# Altium PCB PWR_REVE.PcbDoc
Units mm, origin at the board's own origin, x right, y up, seen from the top; angles counter-clockwise.
Board outline 95.88 x 101.01 mm, 4 copper layers (Top Layer, Layer 1, Layer 2, Bottom Layer), stack 1.586 mm thick; 16 components, 63 nets, 126 pads, 43 vias.
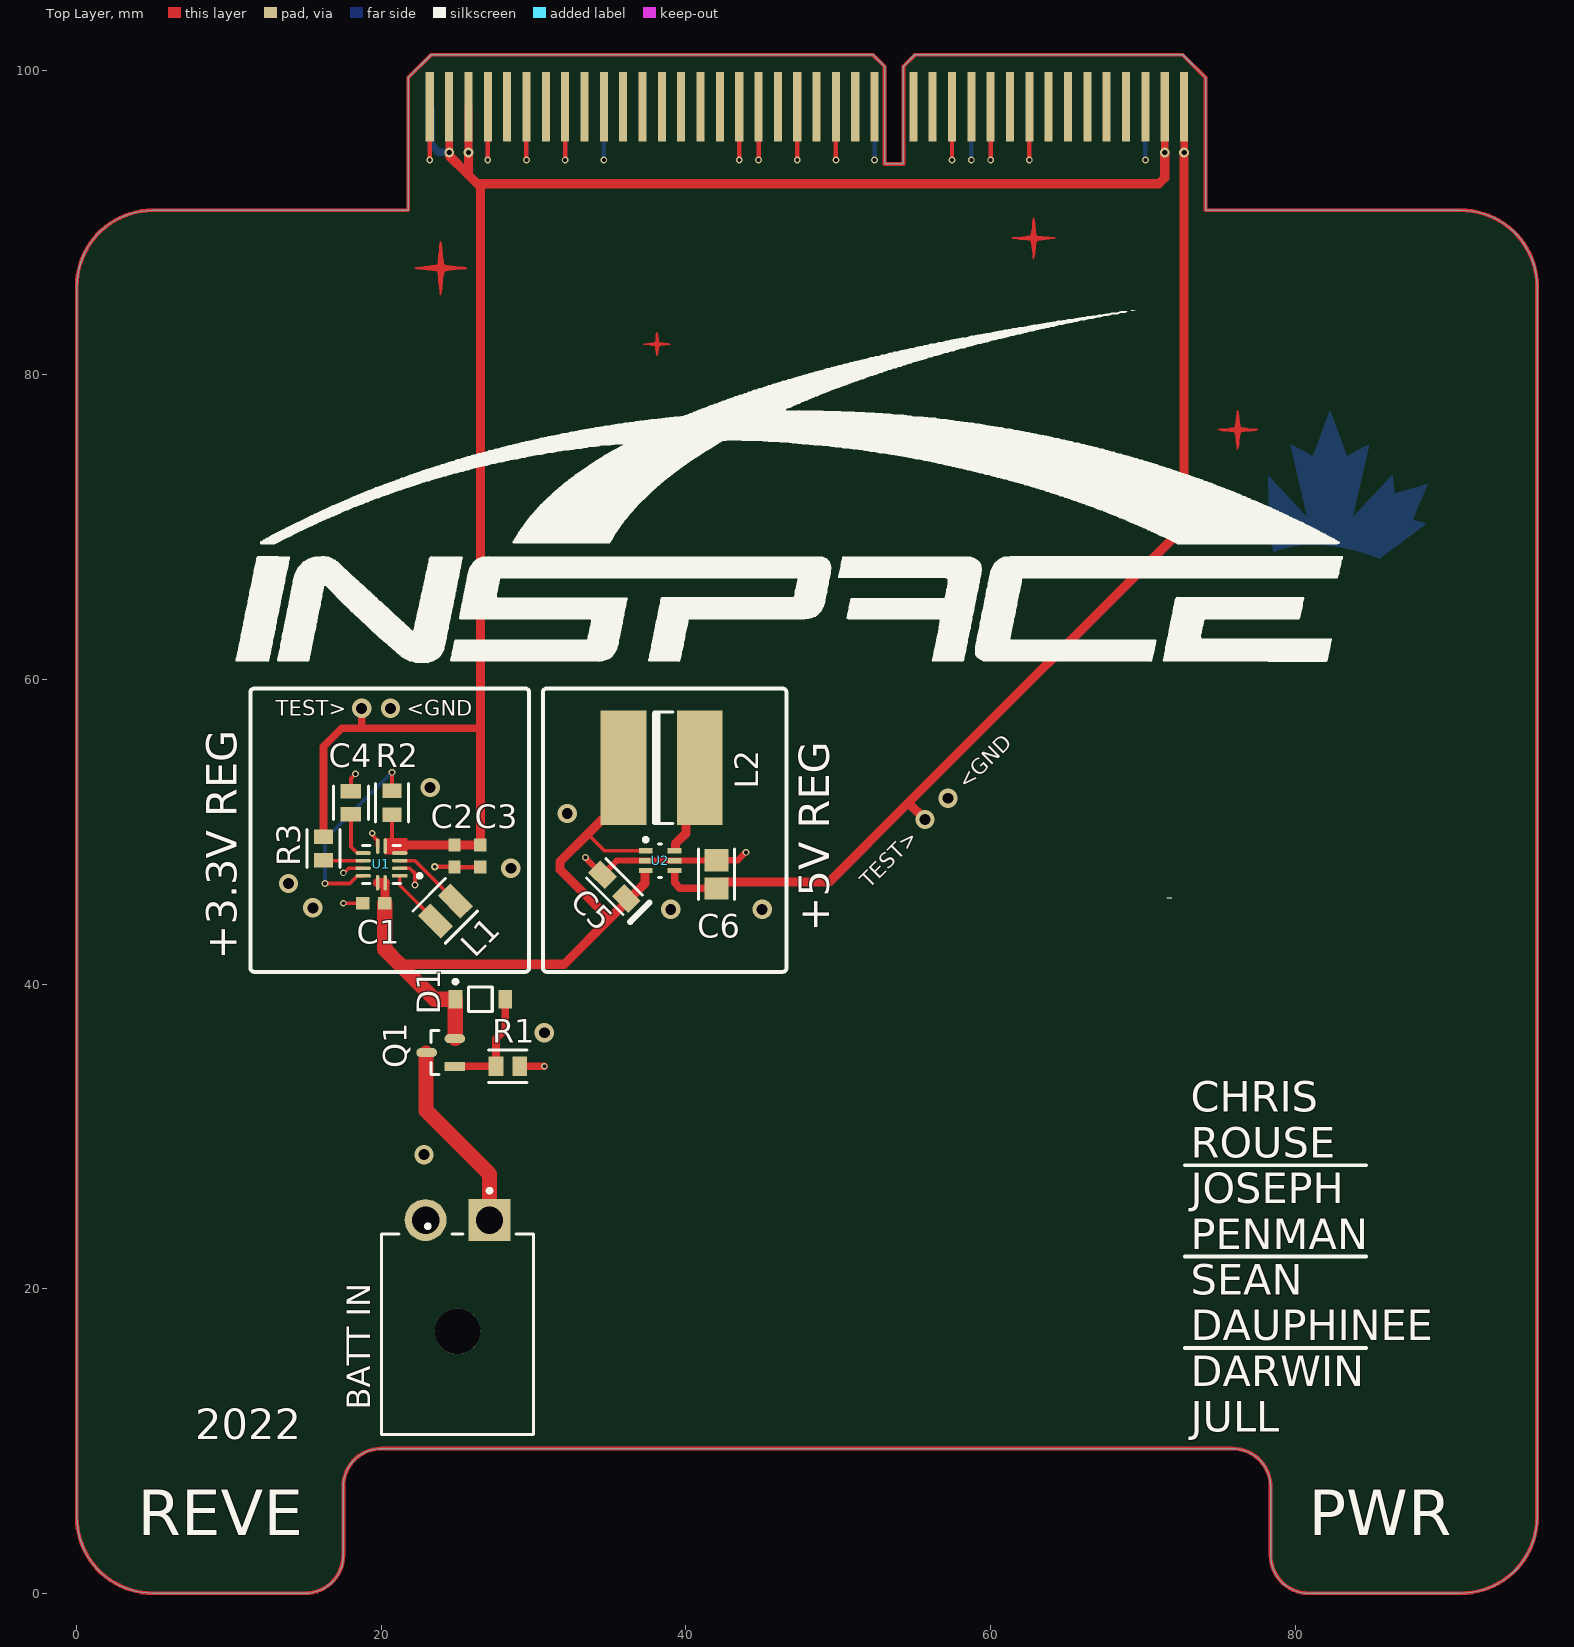
[diagram p0: Top Layer view]
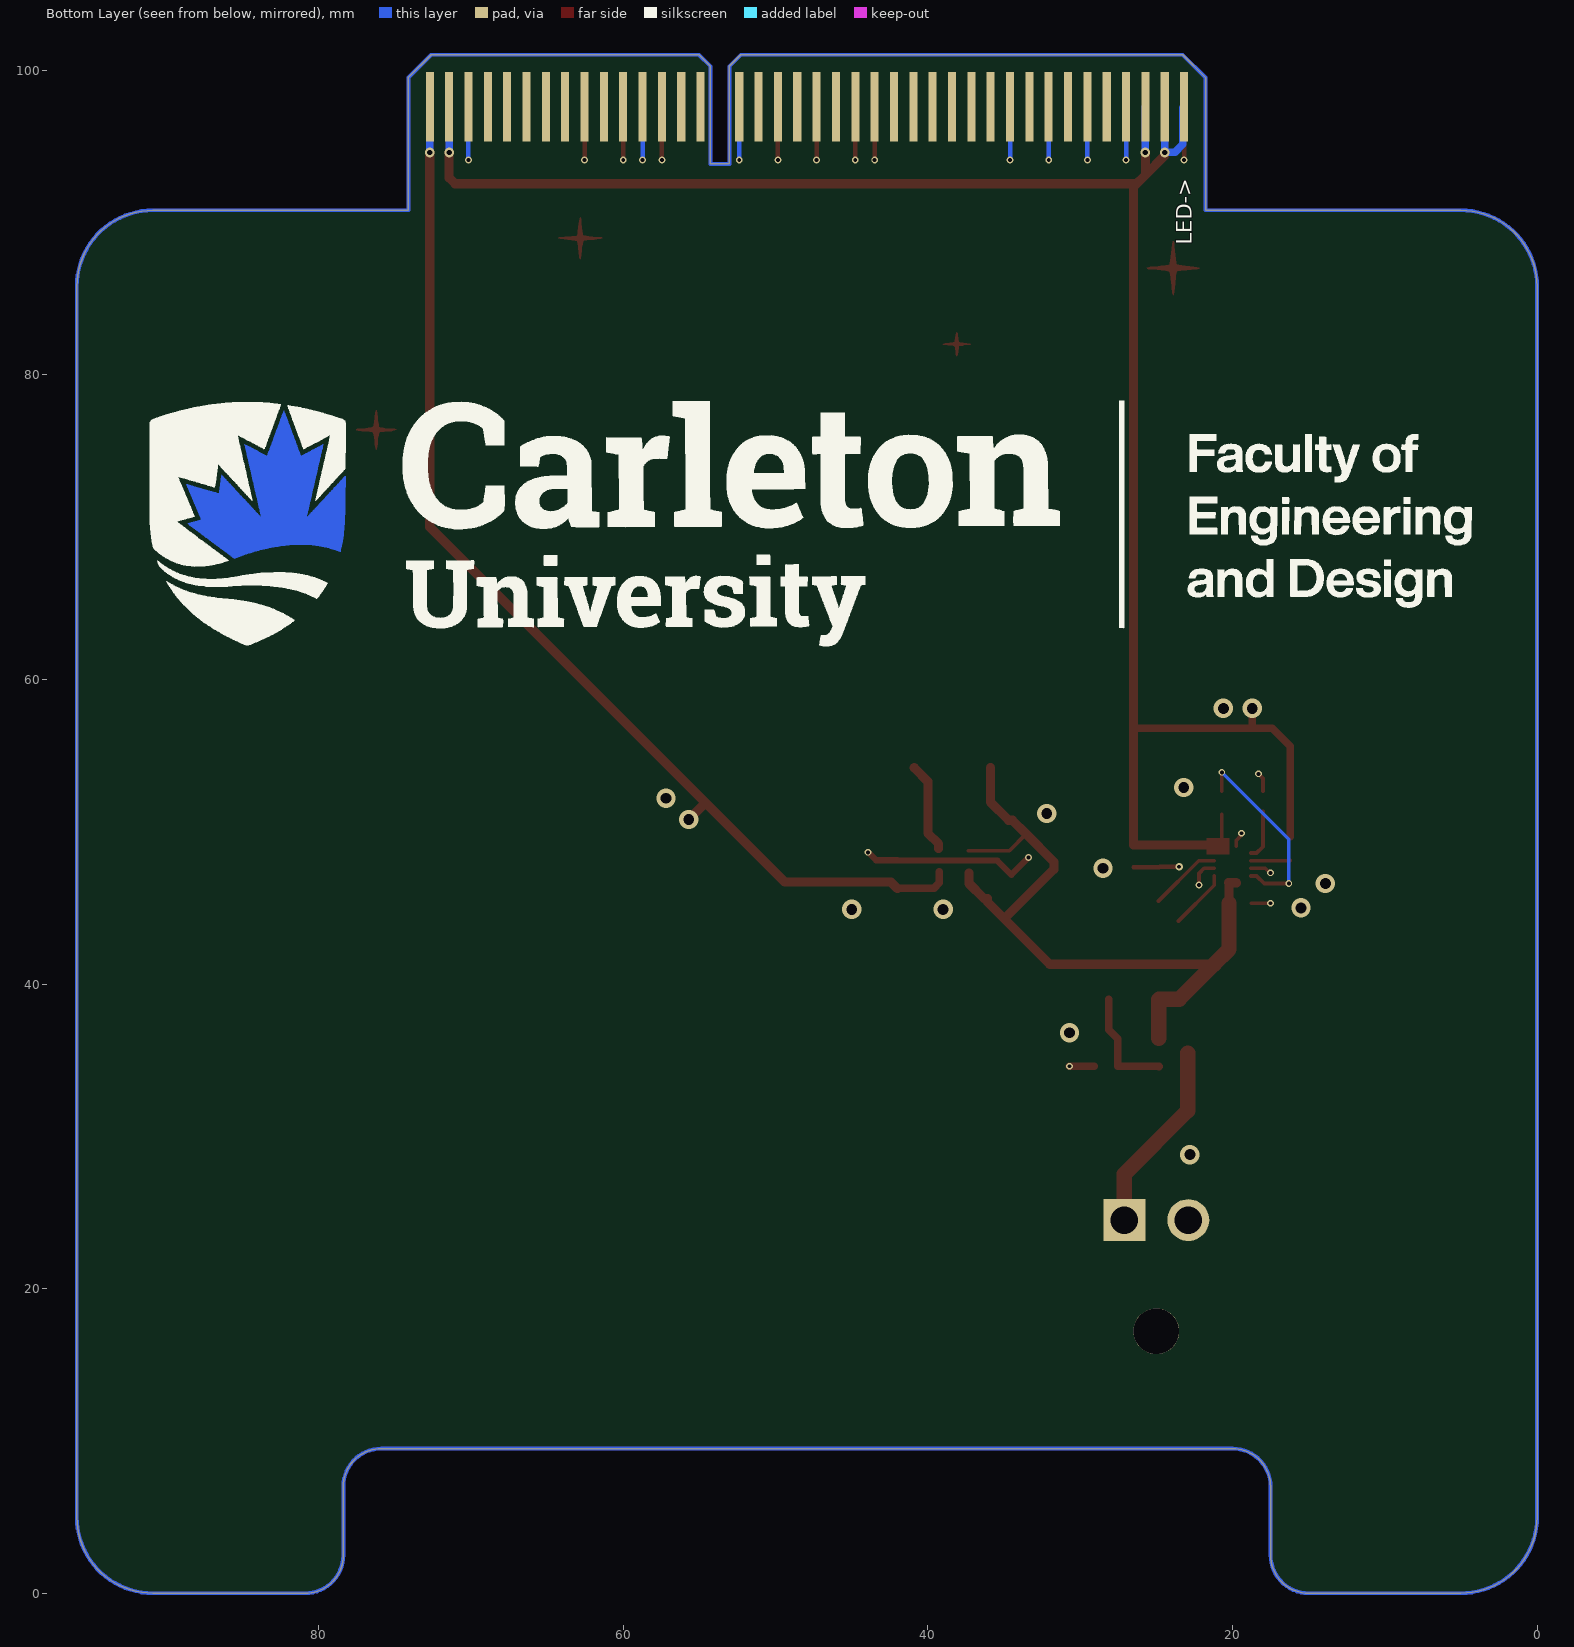
[diagram p1: Bottom Layer view, seen from below]
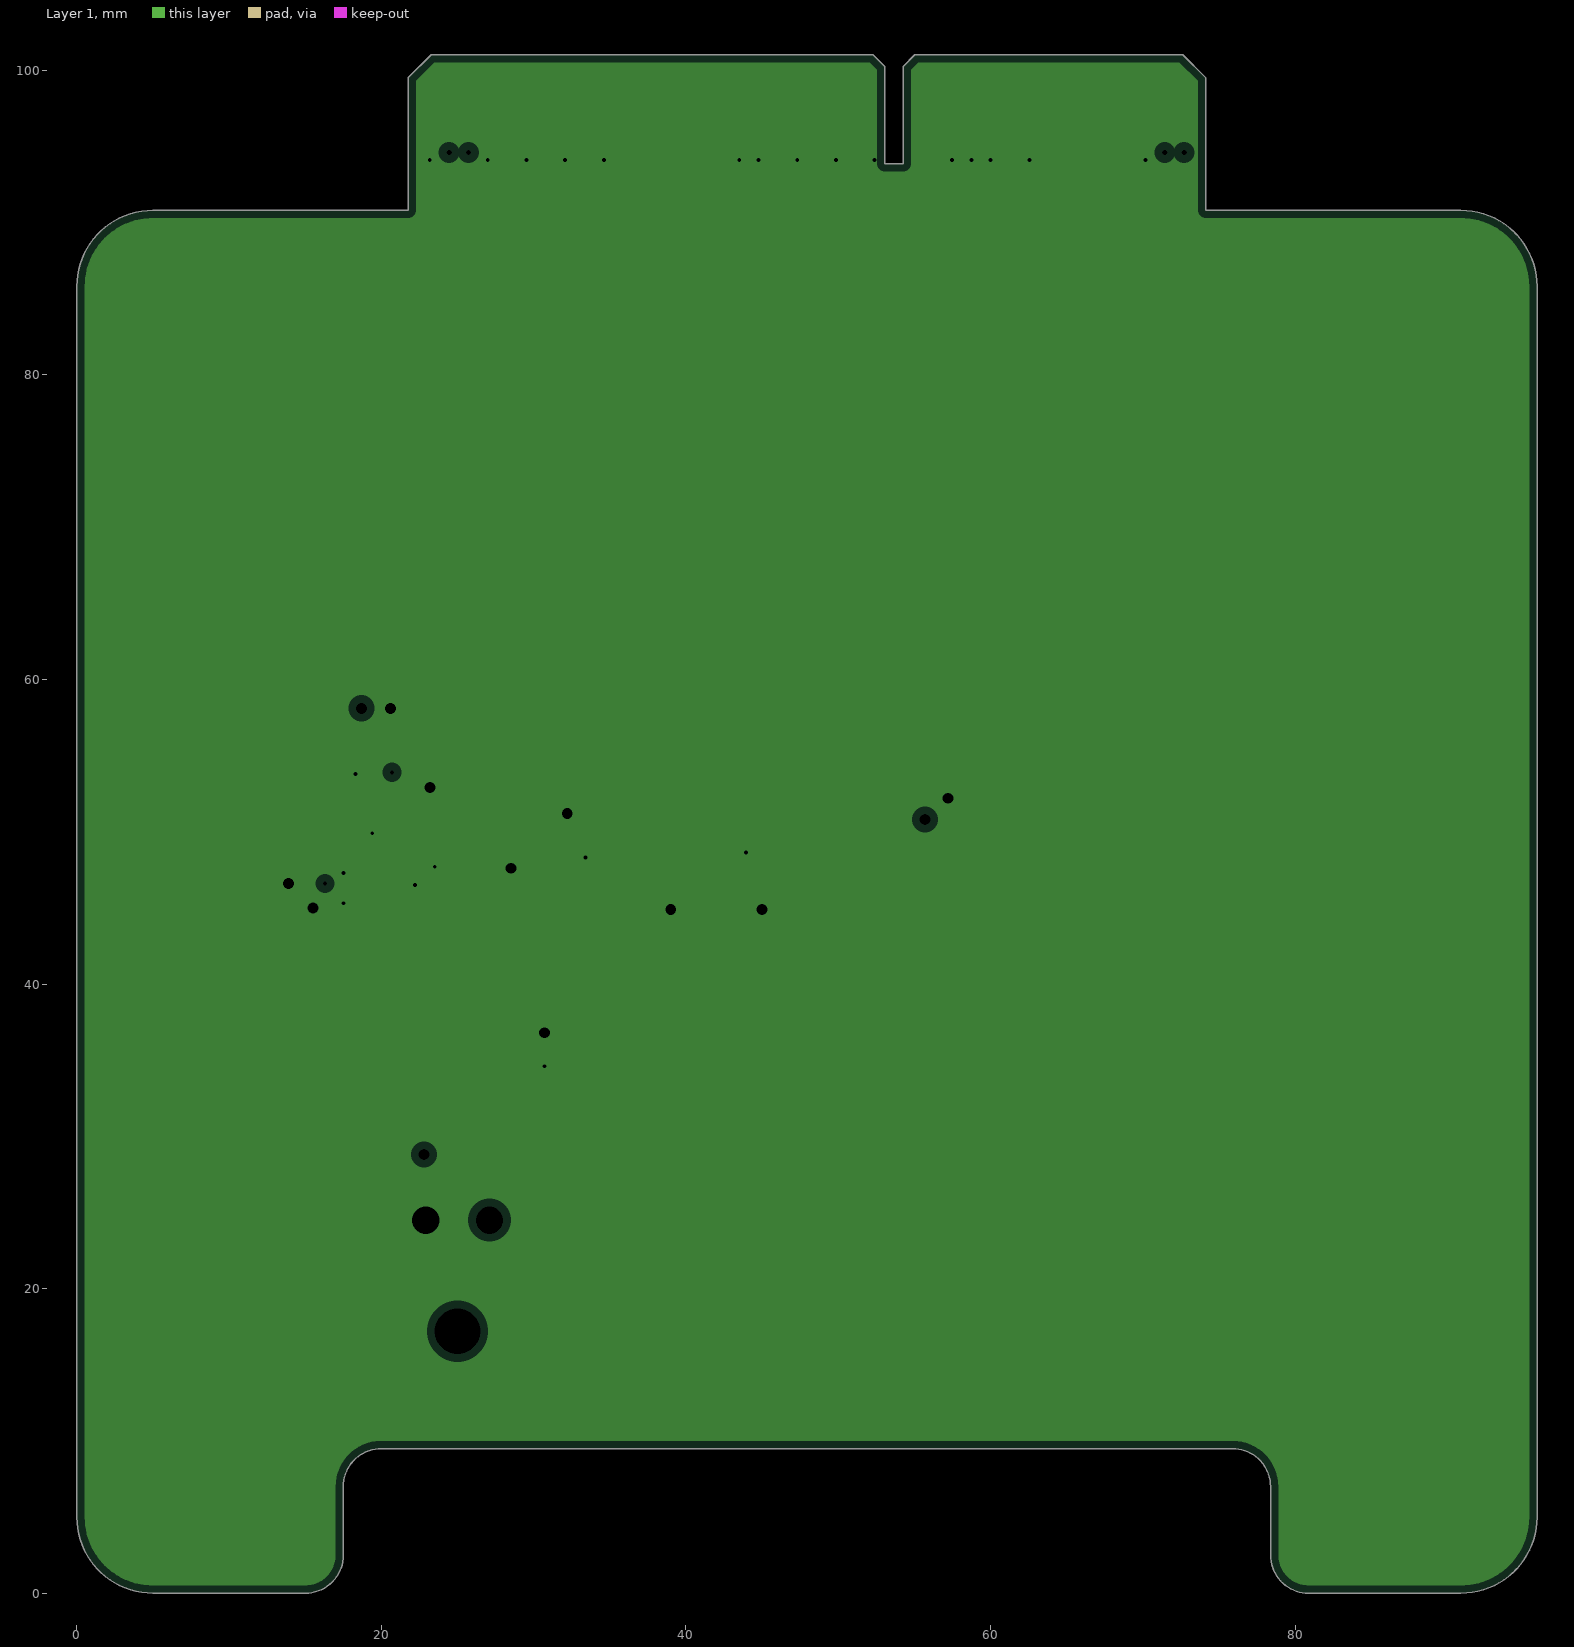
[diagram p2: Layer 1, clearances drawn from the general rule]
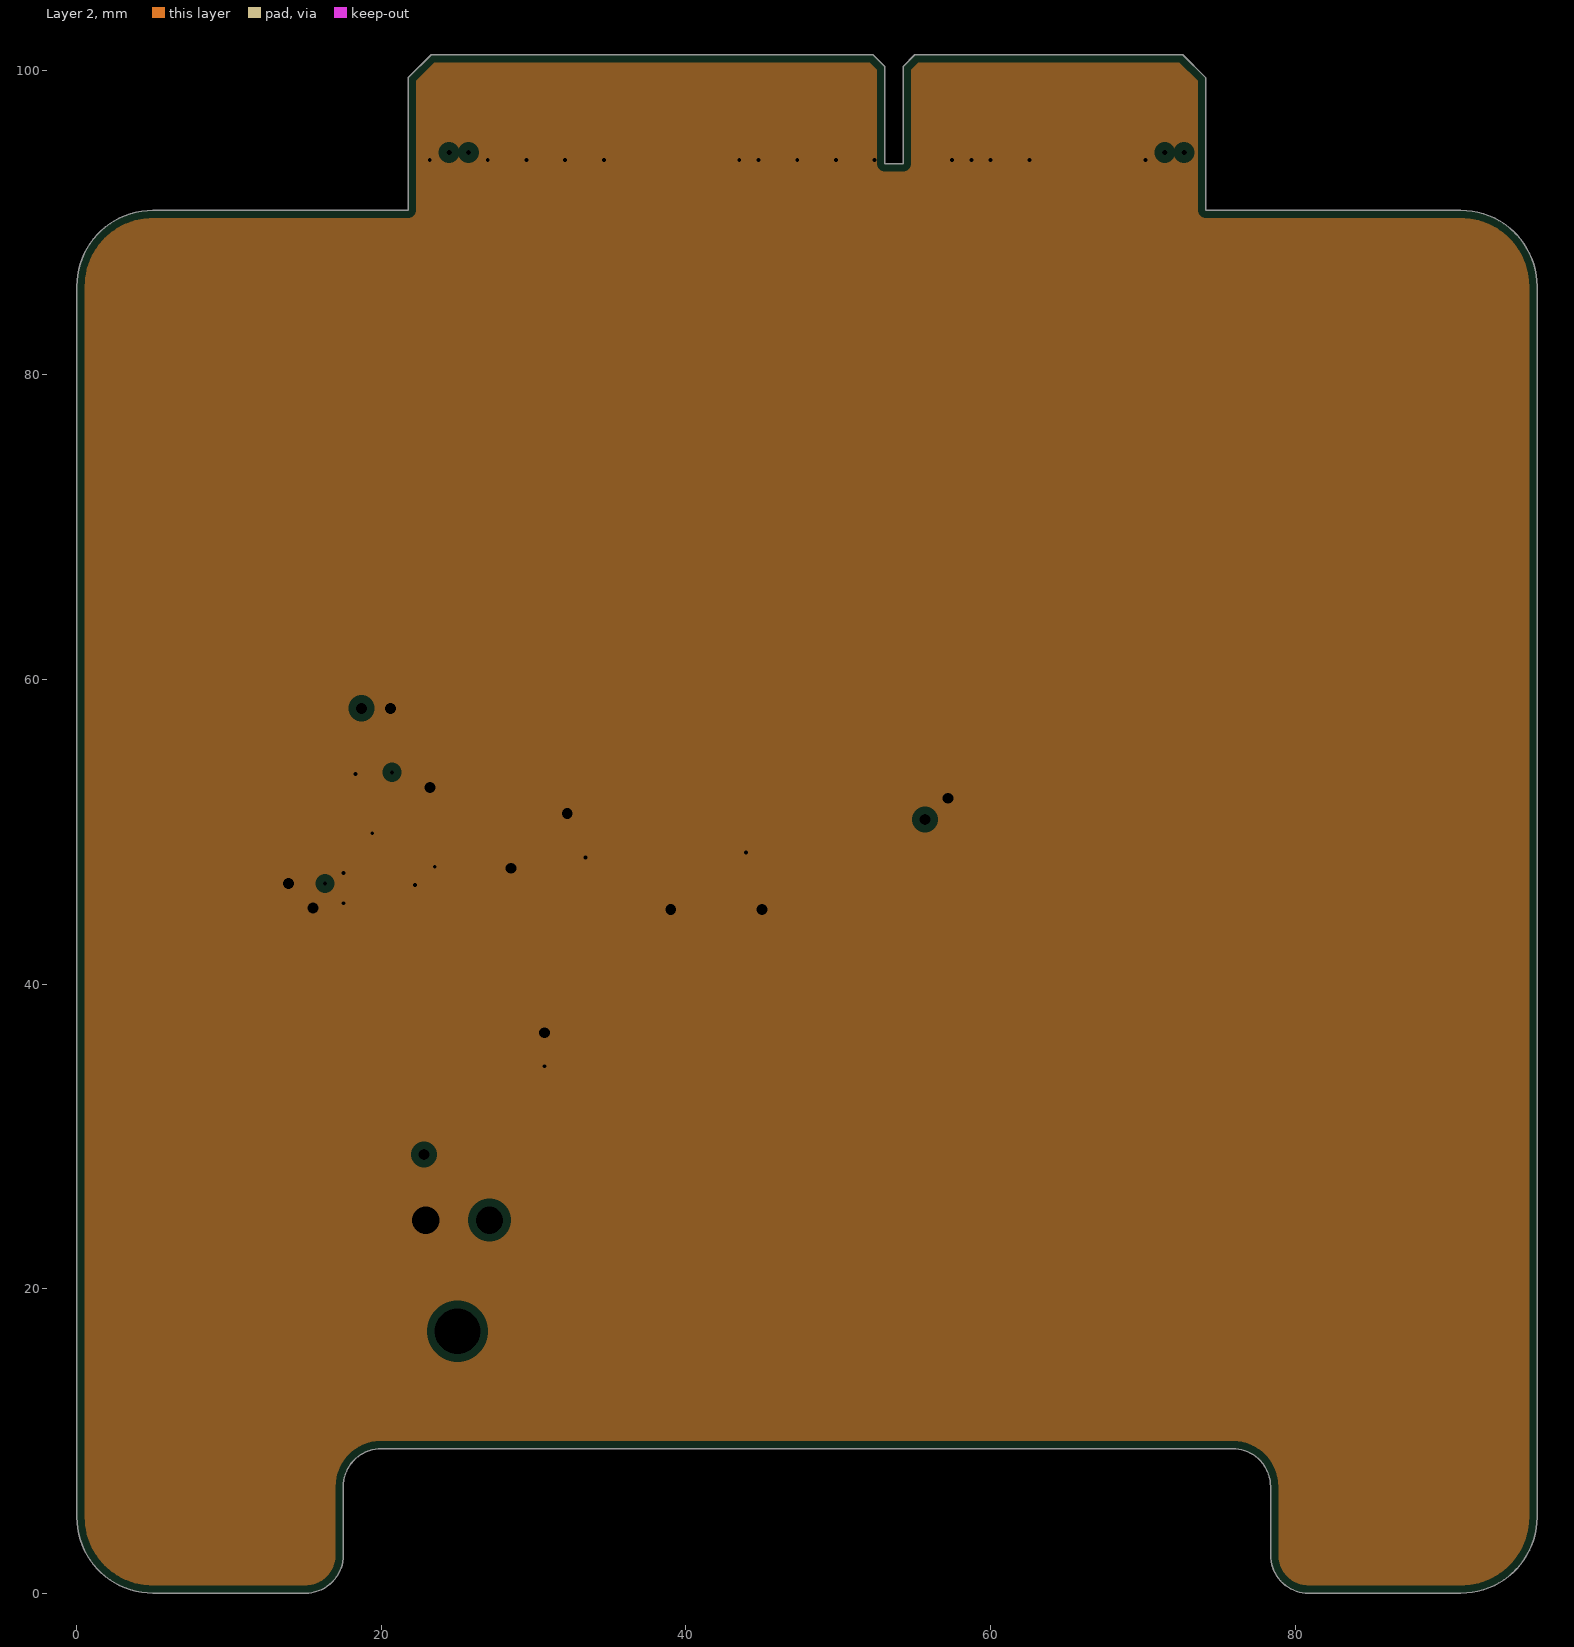
[diagram p3: Layer 2, clearances drawn from the general rule]
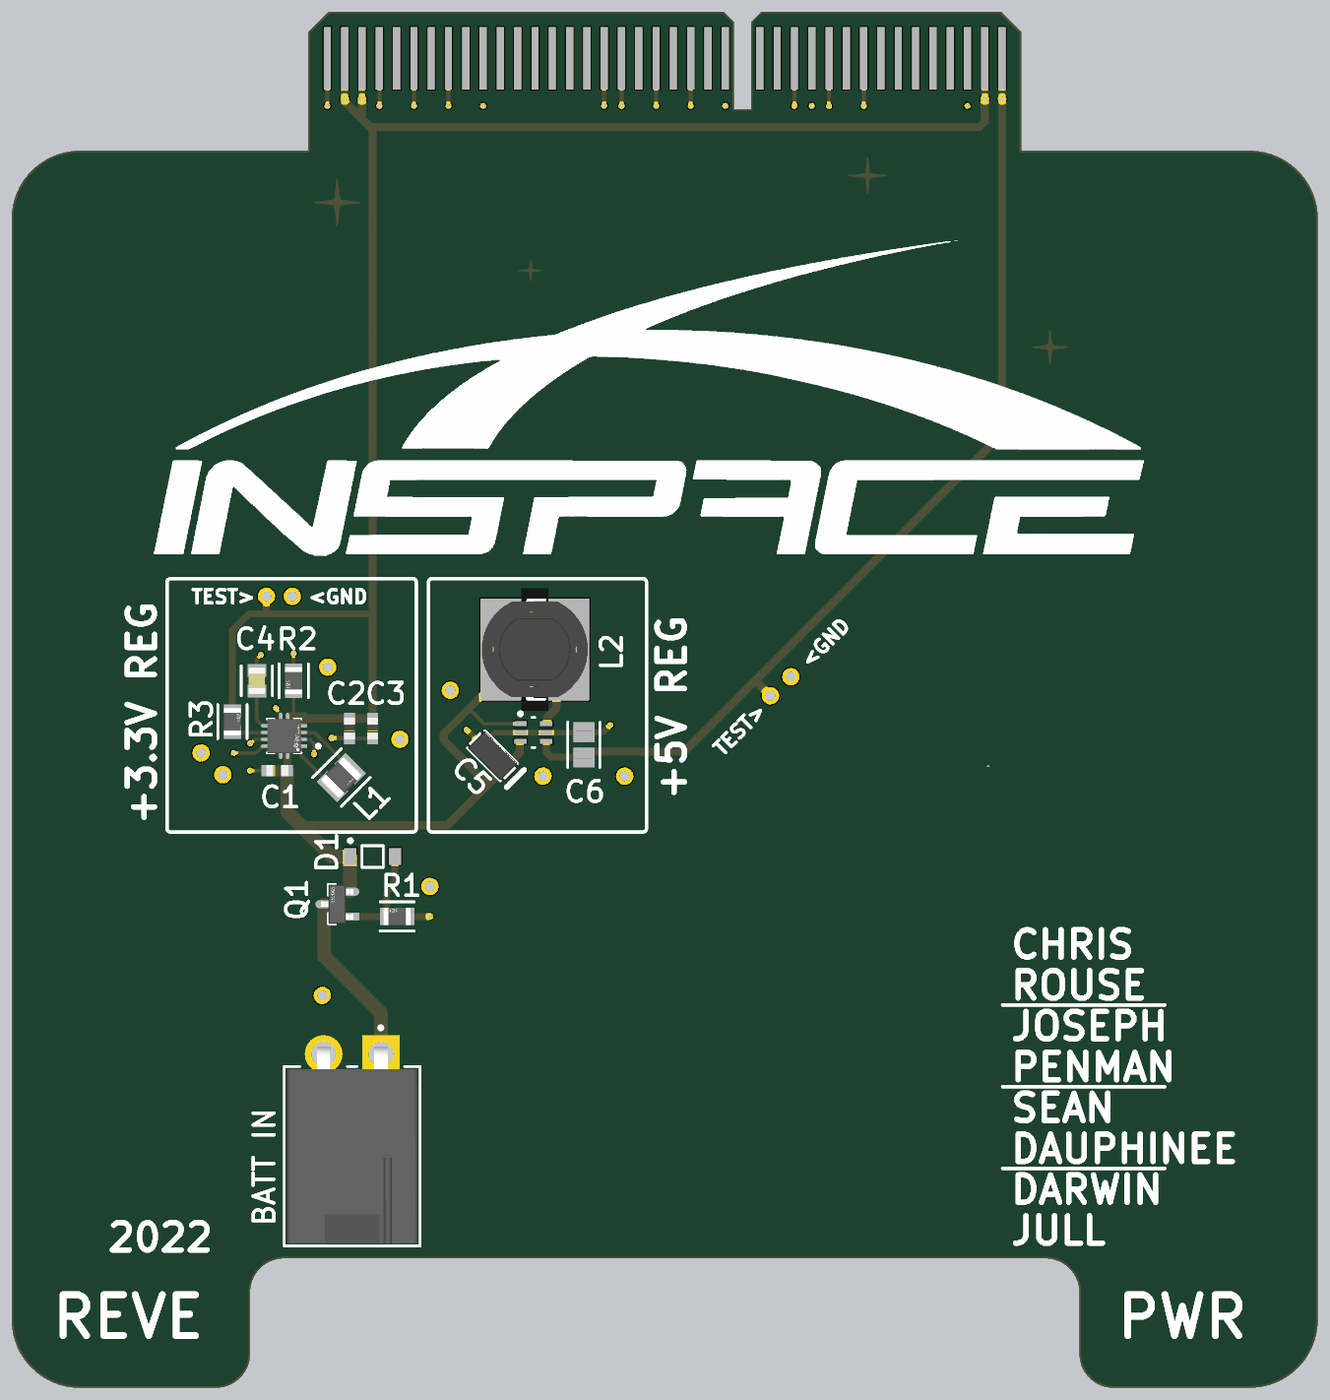
[diagram p4: 3D render of the assembled board from above, using the file's embedded part models]

## Layer stack, top to bottom
Top Solder: solder mask 0.0203, Solder Resist, Dk 3.8
Top Layer: signal copper 0.035
Dielectric 2: prepreg 0.2104, PP-006, Dk 4.6
Layer 1: plane copper 0.0152, net GND
Dielectric 1: dielectric 1.065, FR-4, Dk 4.6
Layer 2: plane copper 0.0152, net GND
Dielectric 3: prepreg 0.2104, PP-006, Dk 4.6
Bottom Layer: signal copper 0.035
Bottom Solder: solder mask 0.0203, Solder Resist, Dk 3.8

## Board outline
5,0 15,0 ccw(c15,2.5) 17.5,2.5 17.5,7 cw(c20,7) 20,9.5 75.885,9.5 cw(c75.885,7) 78.385,7 78.385,2.5 ccw(c80.885,2.5) 80.885,0 90.885,0 ccw(c90.885,5) 95.885,5 95.885,85.805 ccw(c90.885,85.805) 90.885,90.805 74.117,90.805 74.117,99.517 72.617,101.015 55.027,101.015 54.277,100.265 54.277,93.855 53.037,93.855 53.037,100.265 52.287,101.015 23.267,101.015 21.767,99.517 21.768,90.805 5,90.805 ccw(c5,85.805) 0,85.805 0,5 ccw(c5,5)

## Design rules (kind name [scope] priority, off if disabled: settings)
Clearance [All] p1: gap=0.254 ignorepadtopadclearanceinfootprint=TRUE except(0: Arc-Hole Track-Hole SMDPad-Hole THPad-Hole Via-Hole Fill-Hole Poly-Hole Region-Hole Text-Hole; 0.127: Arc-Arc Arc-Track Track-Track SMDPad-SMDPad THPad-THPad)
PlaneClearance [All] p1: clearance=0.508
PlaneConnect [All] p1: pad.planeconnectstyle=Relief pad.reliefexpansion=0.508 pad.reliefentries=4 pad.reliefconductorwidth=0.254 pad.reliefairgap=0.254 via.planeconnectstyle=Direct via.reliefexpansion=0.508 via.reliefentries=4 via.reliefconductorwidth=0.254 via.reliefairgap=0.254
PolygonConnect [All] p1: connectstyle=Relief reliefconductorwidth=0.254 reliefentries=4 polygonreliefangle="90 Angle" airgapwidth=0.254
RoutingVias [All] p1: holewidth=0.254 width=0.445 viastyle="Through Hole" minholewidth=0.2 minwidth=0.4 maxholewidth=6.3 maxwidth=6.4
SolderMaskExpansion [All] p1: expansion=0.102 istentingtop=FALSE
Width [All] p1: maxlimit=2.5 minlimit=0.127 preferedwidth=0.293 minimp=50.000000 maximp=50.000000 favimp=50.000000
28 further rules are at their usual default settings.

## Components (designator, comment, footprint, x,y, rotation, side; value= is the part's Value field where it differs from the comment)
"BATT IN" "172648-0102" FP-172648-0102-MFG 25,17 r0 top locked (schematic designator J1)
C1 "10uF" G-188_MUR 19.5,45.3 r0 top
C2 "10uF" G-188_MUR 24.8,48.4 r90 top
C3 "10uF" G-188_MUR 26.5,48.4 r90 top
C4 "SS CAP" FP-CBR08C-MFG 18,51.9 r90 top value="47 pF"
C5 "10uF" VISH-293D-A_L 35.3,46.4 r135 top
C6 "CL21A226KOQNNNG" FP-CL21-IPC_A 42,47.2 r90 top
D1 "SZMMSZ4679T1G" ONSC-SOD-123-2-425-04_V 26.5,39 r0 top
L1 "1.5uH" FP-DFE252010C-IPC_C 24.2,44.8 r45 top
L2 "10uH" "WE-PD2SR 7850" 38.4,54.2 r0 top
Q1 "DMG2305UX-7" FP-SOT23-IPC_B 23.9,35.5 r180 top
R1 "RES0805" FP-RMCF0805-IPC_C 28.3,34.6 r180 top
R2 "PULL UP RES10kΩ" FP-RMCF0805-IPC_C 20.7,51.9 r270 top
R3 "1MΩ" FP-RMCF0805-IPC_C 16.2,48.9 r90 top
U1 "TPS63051RMWT" FP-RMW0012A-IPC_A 20.001,47.85 r180 top
U2 "LTC3525ESC6-5#TRMPBF" LT-SC6-6-SC70_N 38.3,48.1 r0 top

## Footprints (in the part's own frame and the unit in brackets; to place one, negate y for a bottom-side part, rotate by r counter-clockwise, add the part's x,y. Pads: shape width x height; smd on the part's side, far side on the other; paste and mask are expansions set on the pad)
FP-172648-0102-MFG [mm]
  rect 2.75x2.75 hole 1.8 paste-1000 mask+0: 1(2.1,7.5)
  round 2.75 hole 1.8 paste-1000 mask+0: 2(-2.1,7.5)
  round 3 hole 3 unplated paste-1000 mask+0: ""(0,0.2)
  silkscreen extent -4.99,-6.59 4.99,9.55, body extent -5.09,-6.69 5.09,8.98, height 0.25
FP-CBR08C-MFG [mm]
  rect 0.95x1.35 smd paste+0 mask+0: 1(-0.75,0) 2(0.75,0)
  silkscreen extent -1.1,-1.15 1.1,1.15, body extent -1.4,-0.85 1.4,0.85, height 0.25
FP-CL21-IPC_A [mm]
  rect 1.455x1.556 smd paste+0 mask+0: 1(-0.926,0) 2(0.926,0)
  silkscreen extent -1.65,-1.18 1.65,1.18, body extent -2.15,-1.28 2.15,1.28, height 0.25
FP-DFE252010C-IPC_C [mm]
  rect 1.155x2.106 smd paste+0 mask+0: 1(-0.926,0) 2(0.926,0)
  silkscreen extent -1.5,-1.5 1.5,1.5, body extent -1.6,-1.2 1.6,1.2, height 0.25
FP-RMCF0805-IPC_C [mm]
  rect 0.955x1.262 smd paste+0 mask+0: 1(-0.776,0) 2(0.776,0)
  silkscreen extent -1.25,-1.07 1.25,1.07, body extent -1.35,-0.77 1.35,0.77, height 0.25
FP-RMW0012A-IPC_A [mm]
  rect 1.01x0.242 smd paste+0 mask+0: 1(-1.201,0.75)
  rrect100% 1.01x0.242 smd paste+0 mask+0: 2(-1.201,0.25) 3(-1.201,-0.25) 4(-1.201,-0.75) 7(1.201,-0.75) 8(1.201,-0.25) 9(1.201,0.25) 10(1.201,0.75)
  rrect100% 0.242x1.01 smd paste+0 mask+0: 5(-0.25,-1.201) 6(0.25,-1.201) 11(0.25,1.201) 12(-0.25,1.201)
  silkscreen extent -2.63,-1.25 1.25,1.25, body extent -2.21,-2.21 2.21,2.21, height 0.25
FP-SOT23-IPC_B [mm]
  rect 1.359x0.587 smd paste+0 mask+0: 1(-0.927,0.915)
  rrect100% 1.359x0.587 smd paste+0 mask+0: 2(-0.927,-0.915) 3(0.927,0)
  silkscreen extent 0.13,-1.45 0.65,1.45, body extent -1.86,-1.7 1.86,1.7, height 0.25
G-188_MUR [mil]
  rect 34x32 smd paste+0 mask+0: 1(-28.5,0) 2(28.5,0)
  body extent -31,-16 31,16, height 35
LT-SC6-6-SC70_N [mm] "SOT23, 6-Leads, Body 2.2x1.35mm, Pitch 0.65mm, IPC Medium Density"
  rect 0.9x0.35 smd: 1(-0.95,0.65) 2(-0.95,0) 3(-0.95,-0.65) 4(0.95,-0.65) 5(0.95,0) 6(0.95,0.65)
  silkscreen extent -1.07,-1.1 0.1,1.5, body extent -0.67,-1.1 0.67,1.1, height 1
ONSC-SOD-123-2-425-04_V [mm] "SOD, 2-Leads, Body 2.69x1.6mm"
  rect 0.91x1.22 smd: 1(-1.635,0) 2(1.635,0)
  silkscreen extent -1.76,-0.8 0.78,1.28, body extent -1.35,-0.8 1.35,0.8, height 1.35
VISH-293D-A_L [mm] "Molded Capacitor, 2-Leads, Body 3.4x1.8mm, IPC High Density"
  rect 1.55x1.15 smd: 1(-1.1,0) 2(1.1,0)
  silkscreen extent -2.37,-0.9 1.7,0.9, body extent -1.92,-0.9 1.92,0.9, height 1.8
"WE-PD2SR 7850" [mm] "Chip Inductor, 2-Leads, Body 7.8x7.0mm, IPC Medium Density"
  rect 3x7.5 smd: 1(-2.5,0) 2(2.5,0)
  silkscreen extent -0.63,-3.68 0.75,3.65, body extent -3.9,-3.5 3.9,3.5, height 5

## Part data
"BATT IN": library part CMP-04776-000216-1, "CONN HEADER R/A 2POS 4.2MM"
C1 C2 C3: library part GRM188R60J106ME84D, "No Description Available", Mfr_Name=Murata, Copyright="Copyright (C) 2022 Ultra Librarian. All rights reserved.", Digi-Key_Part_Number_1=490-7316-1-ND, Digi-Key_Part_Number_2=490-7316-2-ND, Digi-Key_Part_Number_3=490-7316-6-ND, Manufacturer_Part_Number=GRM188R60J106ME84D, RefDes=RefDes, Type=DEV
C4: library part CMP-03020-025427-1, "CAP0805", Capacitance="47 pF", Manufacturer=KEMET, Manufacturer Part Number=CBR08C470FAGAC, Package=CBR08C, Temperature="-55°C to +125°C", Temperature Characteristic=C0G, Temperature Coefficient=30ppm/°C, Temperature Range High=+125°C, Temperature Range Low=-55°C, Tolerance=0.01, Voltage Rating="250 V", Automotive=No, Category=Cap, ComponentLink2Description=Datasheet, ComponentLink2URL=https://content.kemet.com/datasheets/KEM_C1030_CBR_SMD.pdf, Device Class L1="Passive Components", Device Class L2=Capacitors, Device Class L3="Ceramic Capacitors", Digikey Description="CAP CER 47PF 250V C0G/NP0 0805", Height=0.95mm, Ipc Land Pattern Name=CAPC200125X85, Lead Free=Yes, Material=Ceramic, Octopart=https://octopart.com/cbr08c470fagac-kemet-23843310, RoHS=TRUE
C5: library part CMP-2000-05555-1, "Tantalum Capacitor, 10 uF, +/- 10%, 10 V, -55 to 125 degC, 1206 (3216 Metric), RoHS, Tape and Reel", Capacitance=10000000pF, Case Code=A, Case Style=Molded, Manufacturer=Vishay, Operating Temp Range=-55Cto125C, Package / Case=3216-18, Package Description="2-Pin Surface Mount Device, Body 3.2 x 1.6 mm", Package Reference=293D-A, Tolerance (+ or -)=10%, Voltage=10VDC, Construction=SMTChip, Datasheet URL=http://www.vishay.com/docs/40002/293d.pdf, Datasheet Version=08/2016, DCL=1uA, DELETED=Compliant, DF=6%, ESR=3.4ohm, Failure Rate=NotRequired, Insulation=NotRequired, Lead Spacing (nom)=NotRequiredmm, Length W/Weld=NotRequiredmm, Length W/Weld (max)=NotRequiredmm, Manufacturer URL=http://www.vishay.com/, Mounting Style=SurfaceMount, Mounting Technology=SurfaceMount, Packaging=TapeandReel, Polarity=Polar, Product Depth (mm)=1.6mm, Product Diameter (mm)=NotRequiredmm, Product Height (mm)=1.6mm, Product Length (mm)=3.2mm, Rad Hardened=No, Seal=NotRequired, Seated Plane Height=NotRequiredmm, Wire Form=NotRequired
C6: library part CMP-13271-000211-1, "CL21 Series 0805 22uF 16V ±10% Tolerance X5R Multilayer Ceramic Chip Capacitor", Capacitance=22uF, Case/Package=0805, Max Operating Temperature=85°C, Min Operating Temperature=-55°C, Package Quantity=3000, Tolerance=10%, Voltage Rating=16V, Lead Free="Lead Free", Length=0.079inch, Mount="Surface Mount", Packaging="Tape and Reel", Thickness=0.055inch, Width=0.049inch
D1: library part CMP-1060-00472-1, "Zener Voltage Regulator, 500 mW, 2-Pin SOD-123, Pb-Free, Tape and Reel", Manufacturer="On Semiconductor", ComponentLink1Description="Manufacturer URL", ComponentLink1URL=http://www.onsemi.com/, ComponentLink2Description=Datasheet, ComponentLink2URL=http://www.onsemi.com/pub_link/Collateral/MMSZ4678T1-D.PDF, ComponentLink3Description="Package Specification", ComponentLink3URL=http://www.onsemi.com/pub_link/Collateral/425-04.PDF, DatasheetVersion="Rev. 9", Mounting Technology="Surface Mount", P Max (W)=0.5, PackageDescription="2-Pin SOD, Body 1.6 x 2.69 mm", PackageReference=SOD-123-2-425-04, PackageVersion="Rev. G, 10/2009", Packing="Tape and Reel", PartNumber=SZMMSZ4679T1G, RoHS=Pb-Free, VZ Typ (V)=2
L1: library part CMP-06042-002962-1, "Shielded Wirewound Inductor 1.5uH  1900mA 0.108Ω 1008 (2520)", Case Code (Imperial)=1008, Case Code (Metric)=2520, Current Rating=2.1A, DC Resistance (DCR)=108mR, Max DC Current=2.3A, Max Operating Temperature=85°C, Min Operating Temperature=-40°C, Resistor Type=Wirewound, Test Frequency=1MHz, Tolerance=20%, Case/Package=1008, Core Material=Ferrite, Depth=2mm, Height - Seated (Max)=0.039inch, Inductance=1.5uH, Length=0.098inch, Mount="Surface Mount", Packaging="Tape and Reel", Shielding=Shielded, Width=0.079inch
L2: library part CMP-1397-00015-1, "Shielded Power Inductor WE-PD2SR, L=10.0 µH", Inductance="10.0 ÂµH", Manufacturer="Wuerth Elektronik", PartNumber=744787100, ComponentLink1Description="Manufacturer URL", ComponentLink1URL=http://www.we-online.com, ComponentLink2Description=Datasheet, ComponentLink2URL=http://www.we-online.de/katalog/media/pdf/744787100.pdf, PackageReference="WE-PD2SR 7850"
Q1: library part CMP-1693-00002-4, "MOSFET P-CH 20V 4.2A SOT23", Case/Package=SOT-23, Continuous Drain Current (ID)=4.2A, Drain to Source Resistance=200mR, Drain to Source Voltage (Vdss)=20V, Gate to Source Voltage (Vgs)=8V, Input Capacitance=808pF, Max Operating Temperature=150°C, Max Power Dissipation=1.4W, Min Operating Temperature=-55°C, On-State Resistance=52MR, Package Quantity=3000, Threshold Voltage=-900mV, Contact Plating=Tin, Element Configuration=Single, Fall Time=34.7ns, Height=1.1mm, Lead Free="Lead Free", Length=3mm, Mount="Surface Mount", Number of Channels=1, Number of Pins=3, Packaging="Tape and Reel", Radiation Hardening=No, Rds On Max=52mR, REACH SVHC="No SVHC", Rise Time=13.7ns, Turn-Off Delay Time=79.3ns, Turn-On Delay Time=10.8ns, Weight=0.000282oz, Width=1.4mm
R1: library part CMP-26527-000066-1, "10kΩ", Case Code (Imperial)=0805, Case Code (Metric)=2012, Max Operating Temperature=155°C, Max Power Dissipation=125mW, Min Operating Temperature=-55°C, Resistance=1MR, Resistor Type="Thick Film", Temperature Coefficient=200ppm/°C, Tolerance=5%, Case/Package=0805, Construction=Rectangular, Contact Plating=Tin, Depth=1.25mm, Features="Automotive AEC-Q200", Height=0.026inch, Lead Free="Lead Free", Length=2mm, Military Standard=Not, Mount="Surface Mount", Number of Terminations=2, Packaging="Tape and Reel", Radiation Hardening=No, RoHS Compliant=Yes, Series=RMCF, Width=0.049inch
R2: library part CMP-26527-000066-1, "10kΩ 0805", Case Code (Imperial)=0805, Case Code (Metric)=2012, Max Operating Temperature=155°C, Max Power Dissipation=125mW, Min Operating Temperature=-55°C, Resistance=1MR, Resistor Type="Thick Film", Temperature Coefficient=200ppm/°C, Tolerance=5%, Case/Package=0805, Construction=Rectangular, Contact Plating=Tin, Depth=1.25mm, Features="Automotive AEC-Q200", Height=0.026inch, Lead Free="Lead Free", Length=2mm, Military Standard=Not, Mount="Surface Mount", Number of Terminations=2, Packaging="Tape and Reel", Radiation Hardening=No, RoHS Compliant=Yes, Series=RMCF, Width=0.049inch
R3: library part CMP-26527-000066-1, "1MΩ ±5% 0.125W 0805 Thick Film Chip Resistor AEC-Q200 compliant", Case Code (Imperial)=0805, Case Code (Metric)=2012, Max Operating Temperature=155°C, Max Power Dissipation=125mW, Min Operating Temperature=-55°C, Resistance=1MR, Resistor Type="Thick Film", Temperature Coefficient=200ppm/°C, Tolerance=5%, Case/Package=0805, Construction=Rectangular, Contact Plating=Tin, Depth=1.25mm, Features="Automotive AEC-Q200", Height=0.026inch, Lead Free="Lead Free", Length=2mm, Military Standard=Not, Mount="Surface Mount", Number of Terminations=2, Packaging="Tape and Reel", Radiation Hardening=No, RoHS Compliant=Yes, Series=RMCF, Width=0.049inch
U1: library part CMP-04918-000317-1, "IC REG BCK BST 3.3V 500MA 12VQFN", Case/Package=VQFN, Max Input Voltage=5.5V, Max Operating Temperature=85°C, Max Output Current=500mA, Min Input Voltage=2.5V, Min Operating Temperature=-40°C, Min Output Voltage=3.3V, Quiescent Current=45uA, Switching Frequency=2.5MHz, Efficiency=95%, Lead Free="Lead Free", Mount="Surface Mount", Nominal Output Voltage=3.3V, Number of Outputs=1, Number of Pins=12, Output Configuration=Positive, Output Current=500mA, Output Type=Fixed, Output Voltage=5.5V, Packaging="Tape and Reel", REACH SVHC="No SVHC", RoHS Compliant=Yes, Synchronous Rectifier=Yes, Topology=Buck-Boost
U2: library part CMP-0492-02056-1, "400 mA Micropower Synchronous Step-Up DC/DC Converter with Output Disconnect, 6-pin SOT23 (SC6-6), -40 to 85 degC, Pb-Free, Mini Tape and Reel", Manufacturer="Linear Technology", Code_JEDEC=MO-203, ComponentLink1Description="Manufacturer URL", ComponentLink1URL=http://www.linear.com/, ComponentLink2Description=Datasheet, ComponentLink2URL=http://cds.linear.com/docs/en/datasheet/3525fb.pdf, ComponentLink3Description="Package Specification", ComponentLink3URL=http://cds.linear.com/docs/en/packaging/SOT_6_05-08-1638.pdf, DatasheetVersion="Rev. B", Mounting Technology="Surface Mount", Number of Outputs=1, PackageDescription="6-Pin Plastic SC70, Body 2 x 1.25 mm, Pitch 0.65 mm", PackageReference=SC6-6, PackageVersion="Rev. B, 06/2010", Packing="Mini Tape and Reel", PartNumber=LTC3525ESC6-5#TRMPBF, RoHS=TRUE

## Free pads (board coordinates)
  rect 0.53x4.572 smd: 1(72.707,97.6) 3(71.437,97.6) 5(70.167,97.6) 7(68.897,97.6) 9(67.627,97.6) 11(66.357,97.6) 13(65.087,97.6) 15(63.817,97.6) 17(62.547,97.6) 19(61.277,97.6) 21(60.007,97.6) 23(58.737,97.6) 25(57.467,97.6) 27(56.197,97.6) 29(54.927,97.6) 31(52.387,97.6) 33(51.117,97.6) 35(49.847,97.6) 37(48.577,97.6) 39(47.307,97.6) 41(46.037,97.6) 43(44.767,97.6) 45(43.497,97.6) 47(42.227,97.6) 49(40.957,97.6) 51(39.687,97.6) 53(38.417,97.6) 55(37.147,97.6) 57(35.877,97.6) 59(34.607,97.6) 61(33.337,97.6) 63(32.067,97.6) 65(30.797,97.6) 67(29.527,97.6) 69(28.257,97.6) 71(26.987,97.6) 73(25.717,97.6) 75(24.447,97.6) 77(23.177,97.6)
  rect 0.53x4.572 smd far side: 2(72.707,97.6) 4(71.437,97.6) 6(70.167,97.6) 8(68.897,97.6) 10(67.627,97.6) 12(66.357,97.6) 14(65.087,97.6) 16(63.817,97.6) 18(62.547,97.6) 20(61.277,97.6) 22(60.007,97.6) 24(58.737,97.6) 26(57.467,97.6) 28(56.197,97.6) 30(54.927,97.6) 32(52.387,97.6) 34(51.117,97.6) 36(49.847,97.6) 38(48.577,97.6) 40(47.307,97.6) 42(46.037,97.6) 44(44.767,97.6) 46(43.497,97.6) 48(42.227,97.6) 50(40.957,97.6) 52(39.687,97.6) 54(38.417,97.6) 56(37.147,97.6) 58(35.877,97.6) 60(34.607,97.6) 62(33.337,97.6) 64(32.067,97.6) 66(30.797,97.6) 68(29.527,97.6) 70(28.257,97.6) 72(26.987,97.6) 74(25.717,97.6) 76(24.447,97.6) 78(23.177,97.6)

## Via types
v1: diameter 0.444, hole 0.254, Top Layer to Bottom Layer, 15 vias
v2: diameter 1.27, hole 0.711, Top Layer to Bottom Layer, 13 vias
v3: diameter 0.445, hole 0.254, Top Layer to Bottom Layer, 10 vias
v4: diameter 0.635, hole 0.356, Top Layer to Bottom Layer, 4 vias
v5: diameter 0.5, hole 0.254, Top Layer to Bottom Layer, 1 vias

## Nets (pads, with @x,y where several pads share a name; then routed paths per layer and width w, separated by ;. In a path a pad name is that pad's centre, name@x,y a point inside that pad or via, vN(x,y) a via of type N, cw(c..) or ccw(c..) an arc to the next point about the centre after c; other vN are vias at no path point)
+3.3V: C2.2 C3.2 pad.3 pad.4 pad.73 pad.74 pad.75 pad.76 pad.78 R2.2 R3.2 U1.4 U1.5 | length 141.4
  Top Layer w0.245: 20.7,49.5 R2.2
  Top Layer w0.5: R3.2 16.2,55.6 17.4,56.8 18.7,56.8 ; v2(18.7,58.1) 18.7,56.8 ; 21.4,49.2 21.4,49.174 21.45,49.124 ; pad.75 v4(24.447,94.6) 24.473,94.574 v4@24.473,94.374 ; v4(25.717,94.6) pad.73 ; 26.5,56.8 18.7,56.8 ; 26.5,92.347 26.5,92.547 ; v4(71.437,94.6) pad.3
  Top Layer w0.6: 21.45,49.124 C2.2 C3.2 26.5,56.8 26.5,92.347 25.673,93.173 v4@24.473,94.374 ; 25.717,93.217 v4(25.717,94.6) ; 26.5,92.547 71.047,92.547 71.437,92.937 v4(71.437,94.6)
  Bottom Layer w0.5: pad.78 23.257,97.52 23.257,95.143 23.774,94.626 24.421,94.626 v4(24.447,94.6) pad.76 ; v4(25.717,94.6) pad.74 ; v4(71.437,94.6) pad.4
+5V: C6.1 pad.1 pad.2 U2.4 | length 76.3
  Top Layer w0.5: U2.4@39.25,47.37 39.25,46.65 39.6,46.3 41.974,46.3 C6.1 ; v4(72.707,94.6) pad.1
  Top Layer w0.6: C6.1 42.427,46.702 49.402,46.702 54.6,51.9 ; v2(55.7,50.8) 54.6,51.9 ; v4(72.707,94.6) 72.707,70.007 54.6,51.9
  Bottom Layer w0.5: v4(72.707,94.6) pad.2
A0: pad.22
A1: pad.20
A2: pad.18
A3: pad.16
A4: pad.14
A5: pad.12
A6: pad.10
A7: pad.8
A12: pad.31
A13: pad.33
Bat+: "BATT IN.1" Q1.3 | length 12.7
  Top Layer w0.5: Q1.3@22.937,35.463 Q1.3
  Top Layer w1: Q1.3@22.937,35.463 22.937,31.682 27.1,27.518 27.1,24.5
DAC0: pad.41
DAC1: pad.37
FETOut: C1.2 C5.1 D1.1 L2.1 Q1.2 U1.11 U1.12 U2.1 U2.3 | length 50
  Top Layer w0.245: 33.55,49.85 34.65,48.75 U2.1
  Top Layer w0.5: Q1.2 Q1.2@24.846,36.434
  Top Layer w0.6: U1.11@19.738,46.635 U1.11 U1.12 20.238,46.635 20.238,45.314 C1.2 ; 21.2,41.3 32,41.3 34.975,44.275 ; D1.1@24.827,39 D1.1@24.846,38.981 ; L2.1 35.9,51.95 34.7,50.75 34.45,50.75 33.55,49.85 31.724,48.024 31.724,47.526 34.975,44.275 ; U2.3@37.3,47.3 37.3,46.6 36.322,45.622 C5.1 36.078,45.378 34.975,44.275
  Top Layer w1: C1.2 20.224,42.276 21.2,41.3 23.5,39 D1.1@24.827,39 ; Q1.2@24.846,36.434 D1.1@24.846,38.981
GND: "BATT IN.2" C1.1 C2.1 C3.1 C4.2 C5.2 C6.2 pad.6 pad.17 pad.21 pad.24 pad.25 pad.32 pad.35 pad.39 pad.43 pad.45 pad.60 pad.63 pad.64 pad.67 pad.68 pad.71 pad.72 pad.77 R1.1 U1.2 U1.6 U1.9 U2.2 U2.5 | length 86.1
  Top Layer w0.245: v3(17.5,45.3) C1.1 ; v3(17.5,47.3) 17.554,47.3 17.854,47.6 U1.9 ; C4.2 18,53.493 18.3,53.793 v3(18.3,53.8) ; v3(19.4,49.9) 19.4,49.784 19.751,49.432 U1.6 ; U1.2 21.204,47.599 21.862,47.599 22.2,47.261 v3(22.2,46.5)
  Top Layer w0.293: v1(23.177,94.1) pad.77 ; v5(23.5,47.7) 23.512,47.688 24.788,47.688 C2.1 C3.1 ; v1(26.987,94.1) pad.71 ; v1(29.527,94.1) pad.67 ; v1(32.067,94.1) pad.63 ; v1(43.497,94.1) pad.45 ; v1(44.767,94.1) pad.43 ; v1(47.307,94.1) pad.39 ; v1(49.847,94.1) pad.35 ; v1(57.467,94.1) pad.25 ; v1(60.007,94.1) pad.21 ; v1(62.547,94.1) pad.17
  Top Layer w0.4: v3(33.4,48.3) C5.2 35.444,48.1 U2.2 U2.5 41.974,48.1 C6.2 43.403,48.126 43.922,48.645 v3(43.934,48.645)
  Top Layer w0.5: R1.1 v3(30.7,34.6)
  Bottom Layer w0.293: v1(26.987,94.1) pad.72 ; v1(29.527,94.1) pad.68 ; v1(32.067,94.1) pad.64 ; v1(34.607,94.1) pad.60 ; v1(52.387,94.1) pad.32 ; v1(58.737,94.1) pad.24 ; v1(70.167,94.1) pad.6
  other v2: 30.7,36.8 39,44.9 45,44.9 15.5,45 13.9,46.6 28.5,47.6 32.2,51.2 57.2,52.2 23.2,52.9 20.6,58.1
GPIO0: pad.58
GPIO1: pad.56
GPIO2: pad.54
GPIO3: pad.52
GPIO4: pad.50
GPIO5: pad.48
GPIO6: pad.46
GPIO7: pad.44
GPIO8: pad.42
GPIO9: pad.40
GPIO10: pad.38
GPIO11: pad.36
GPIO12: pad.34
GPIO13: pad.30
GPIO14: pad.28
GPIO15: pad.26
GPIO22: pad.27
GPIO23: pad.29
I2C0_SCL: pad.69
I2C0_SDA: pad.65
I2C1_SCL: pad.23
I2C1_SDA: pad.19
NetC4_1: C4.1 U1.7 | length 3.3
  Top Layer w0.245: C4.1@18,51.35 18,49.019 18.419,48.6 U1.7
NetD1_2: D1.2 Q1.1 R1.2 | length 7.4
  Top Layer w0.5: Q1.1 24.834,34.593 27.517,34.593 R1.2 27.524,36.391 28.135,37.002 D1.2
NetL1_1: L1.1 U1.1 | length 3.9
  Top Layer w0.245: U1.1 21.202,46.488 L1.1
NetL1_2: L1.2 U1.3 | length 4.7
  Top Layer w0.245: U1.3 22.209,48.1 L1.2
NetL2_2: L2.2 U2.6 | length 6
  Top Layer w0.6: U2.6@39.3,48.9 39.3,49.2 40.001,49.901 40.001,53.301 L2.2
NetR2_1: R2.1 U1.10 | length 13.1
  Top Layer w0.245: v3(16.3,46.6) 17.919,46.6 18.419,47.1 U1.10 ; R2.1 v3(20.7,53.9)
  Bottom Layer w0.245: v3(16.3,46.6) 16.3,49.5 v3(20.7,53.9)
NetR3_1: R3.1 U1.8 | length 2.6
  Top Layer w0.245: R3.1 16.224,48.1 U1.8
PORT0: pad.15
PORT1: pad.13
PORT2: pad.11
PORT3: pad.9
PORT4: pad.7
PORT5: pad.5
SPI_MISO: pad.62
SPI_MOSI: pad.66
SPI_SCK: pad.70
UART0_RX: pad.61
UART0_TX: pad.59
UART1_RX: pad.57
UART1_TX: pad.55
UART2_RX: pad.53
UART2_TX: pad.51
UART3_RX: pad.49
UART3_TX: pad.47
pads on no net: "BATT IN."
copper on no net:
  other v2: 22.8,28.8

## Polygon pours and split planes (outlines as drawn)
GND on Layer 1 (split plane): 298 vertices, not listed, extent 0.509,0.509 95.376,100.505
GND on Layer 2 (split plane): 298 vertices, not listed, extent 0.509,0.509 95.376,100.505

## Other copper
Top Layer:
  rectangle net +3.3V: 20.2,48.5 21.7,49.6
  region: 76.388,76.735 76.409,76.608 76.441,76.576 76.525,76.555 76.673,76.534 76.758,76.513 76.906,76.492 77.18,76.471 77.476,76.45 77.55,76.418 77.529,76.376 77.413,76.344 77.328,76.323 77.18,76.302 76.663,76.249 76.483,76.217 76.43,76.186 76.409,76.143 76.388,76.08 76.356,75.879 76.335,75.668 76.314,75.414 76.272,75.182 76.24,75.108 76.208,75.098 76.177,75.129 76.156,75.341 76.134,75.425 76.113,75.848 76.092,75.911 76.071,76.059 76.05,76.143 75.997,76.217 75.701,76.26 75.427,76.281 75.215,76.302 75.131,76.323 74.994,76.355 74.92,76.386 74.909,76.418 75.004,76.45 75.342,76.471 75.648,76.503 75.754,76.524 76.008,76.566 76.05,76.608 76.071,76.756 76.092,76.841 76.113,77.052 76.134,77.136 76.156,77.559 76.177,77.622 76.198,77.665 76.229,77.675 76.261,77.643 76.293,77.506 76.325,77.221 76.356,76.893 76.377,76.767 76.388,76.756
  region: 63.627,88.862 63.162,88.82 63.078,88.799 63.035,88.757 62.993,88.609 62.972,88.461 62.919,87.943 62.898,87.816 62.877,87.711 62.845,87.637 62.813,87.605 62.782,87.637 62.761,87.911 62.74,88.123 62.718,88.397 62.697,88.461 62.676,88.609 62.644,88.746 62.602,88.809 62.391,88.83 62.042,88.862 61.916,88.883 61.747,88.904 61.472,88.947 61.398,88.978 61.387,88.989 61.419,89.021 61.504,89.042 62.011,89.063 62.074,89.084 62.275,89.116 62.444,89.137 62.634,89.158 62.655,89.221 62.729,89.676 62.75,89.971 62.771,90.225 62.792,90.331 62.813,90.352 62.866,90.299 62.909,90.045 62.93,89.961 62.982,89.401 63.004,89.274 63.025,89.19 63.067,89.147 63.394,89.116 63.648,89.073 63.859,89.052 64.218,89.031 64.282,89.01 64.261,88.968 64.144,88.936 63.637,88.873
  region: 37.714,82.112 37.915,82.144 37.989,82.175 38.01,82.387 38.031,82.64 38.052,82.746 38.094,82.809 38.147,82.756 38.179,82.619 38.221,82.196 38.242,82.154 38.327,82.133 38.57,82.101 38.844,82.059 38.95,82.038 39.013,81.996 38.982,81.964 38.707,81.943 38.337,81.911 38.263,81.88 38.21,81.827 38.179,81.415 38.158,81.33 38.115,81.225 38.073,81.246 38.041,81.341 38.02,81.489 37.989,81.837 37.925,81.901 37.714,81.922 37.629,81.943 37.228,81.964 37.196,81.996 37.228,82.027 37.312,82.049 37.46,82.07 37.545,82.091 37.693,82.112
  region: 23.717,86.454 23.685,86.718 23.622,86.802 23.125,86.855 22.999,86.876 22.713,86.908 22.322,86.94 22.217,86.961 22.175,86.982 22.185,87.035 22.333,87.077 22.544,87.098 22.819,87.119 23.03,87.14 23.115,87.161 23.315,87.193 23.527,87.214 23.632,87.235 23.675,87.256 23.696,87.341 23.717,87.616 23.749,87.88 23.791,88.133 23.812,88.429 23.833,88.704 23.865,88.778 23.875,88.788 23.907,88.757 23.949,88.588 23.992,88.292 24.044,87.753 24.087,87.499 24.108,87.33 24.129,87.246 24.192,87.225 24.604,87.172 24.71,87.151 24.879,87.13 25.154,87.109 25.386,87.087 25.513,87.066 25.618,87.024 25.608,86.971 25.523,86.95 25.375,86.929 24.942,86.897 24.668,86.855 24.382,86.823 24.15,86.781 24.118,86.749 24.065,86.401 24.044,86.274 24.023,86.084 24.002,85.809 23.981,85.619 23.96,85.492 23.939,85.387 23.918,85.302 23.875,85.239 23.844,85.249 23.823,85.461 23.77,86.021 23.749,86.126 23.727,86.295 23.717,86.433
Bottom Layer:
  region: 824 vertices and 0 holes, not listed, extent 78.241,67.937 88.683,77.656
Multi-Layer:
  the board outline again, w0.254

## Silkscreen, mask and mechanical layers (free items; w line width, h text height)
Top Overlay:
  drawing of 28 lines, arcs and shapes, not listed
  text "TEST>" at 13.054,57.6 h1
  text "<GND" at 21.654,57.6 h1
  text "<GND" at 58.433,52.726 h1 r45
  text "TEST>" at 52.033,46.226 h1 r45
  text "+5V REG" at 49.4,43.435 h2 r90
  text "+3.3V REG" at 10.5,41.603 h2 r90
  text "CHRIS" at 73.15,31.6 h2
  text "ROUSE" at 73.15,28.6 h2
  text "JOSEPH" at 73.15,25.6 h2
  text "PENMAN" at 73.15,22.6 h2
  text "SEAN" at 73.15,19.6 h2
  text "DAUPHINEE" at 73.15,16.6 h2
  text "DARWIN" at 73.15,13.6 h2
  text "JULL" at 73.15,10.6 h2
  text "2022" at 7.769,10.1 h2
  text "REVE" at 3.996,3.808 h3
  text "PWR" at 80.893,3.808 h3
Bottom Overlay:
  drawing of 57 lines, arcs and shapes, not listed
  text "LED->" at 22.677,88.554 h1 r270